# EAGLE board nutzen_01 (EAGLE 7.7.0)
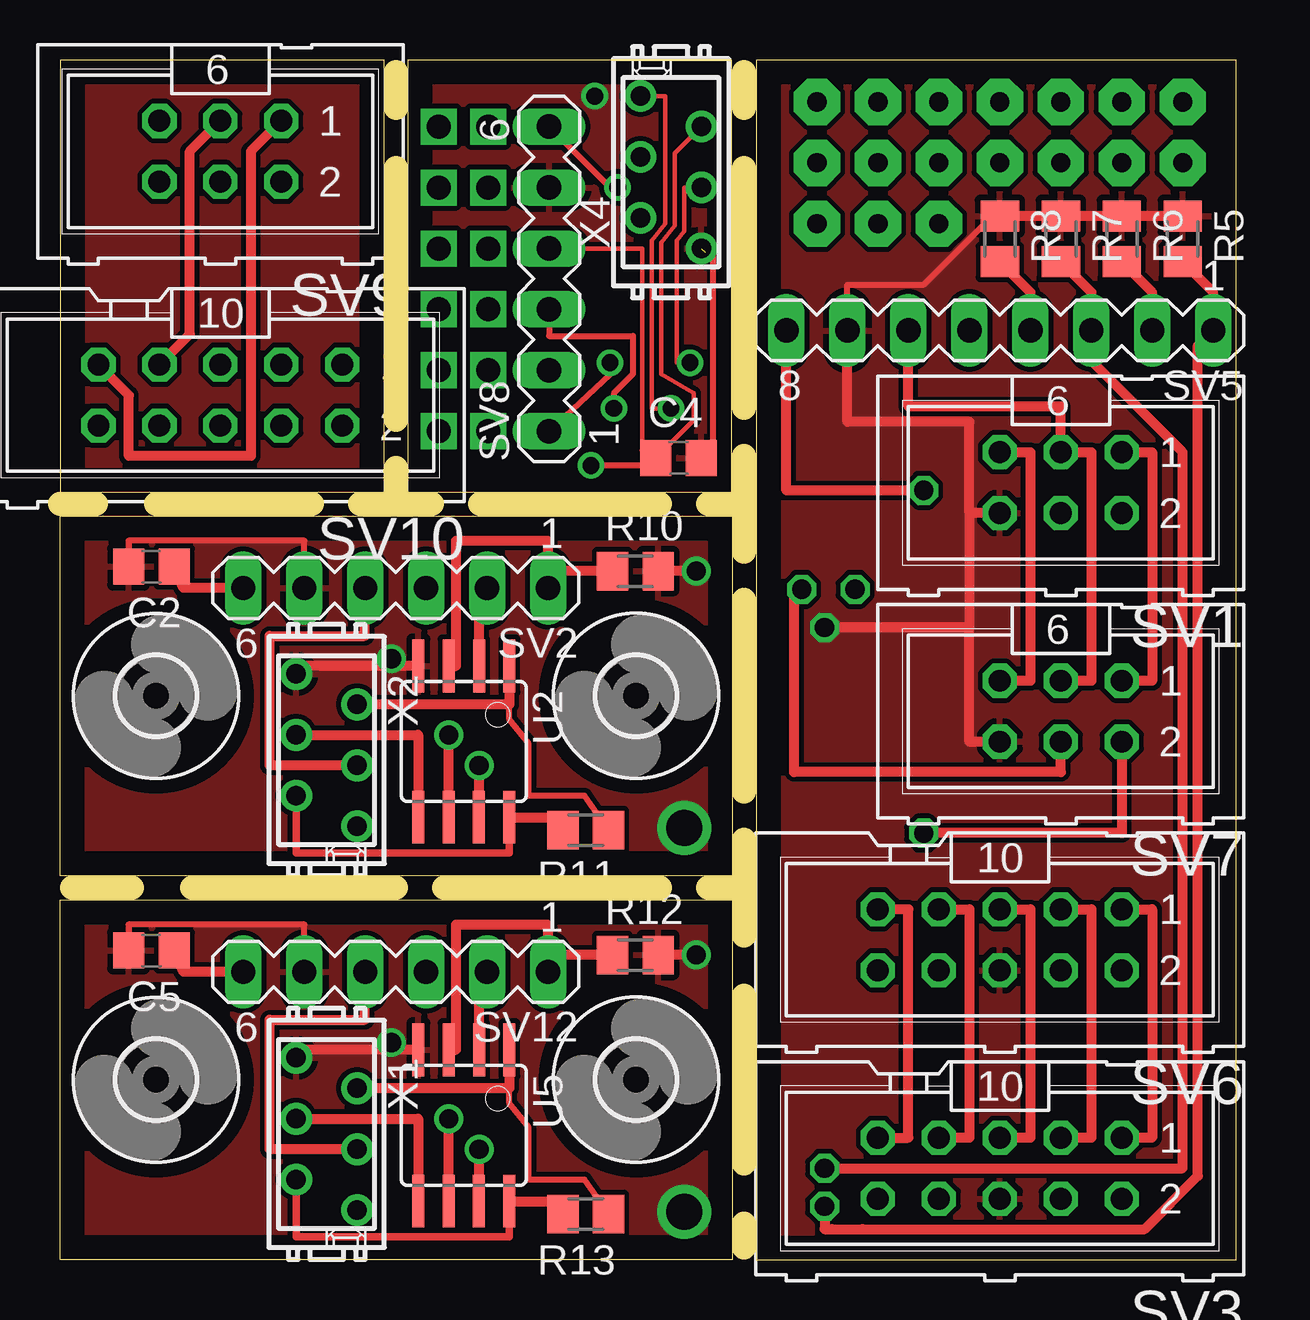
[diagram p0: board, top side]
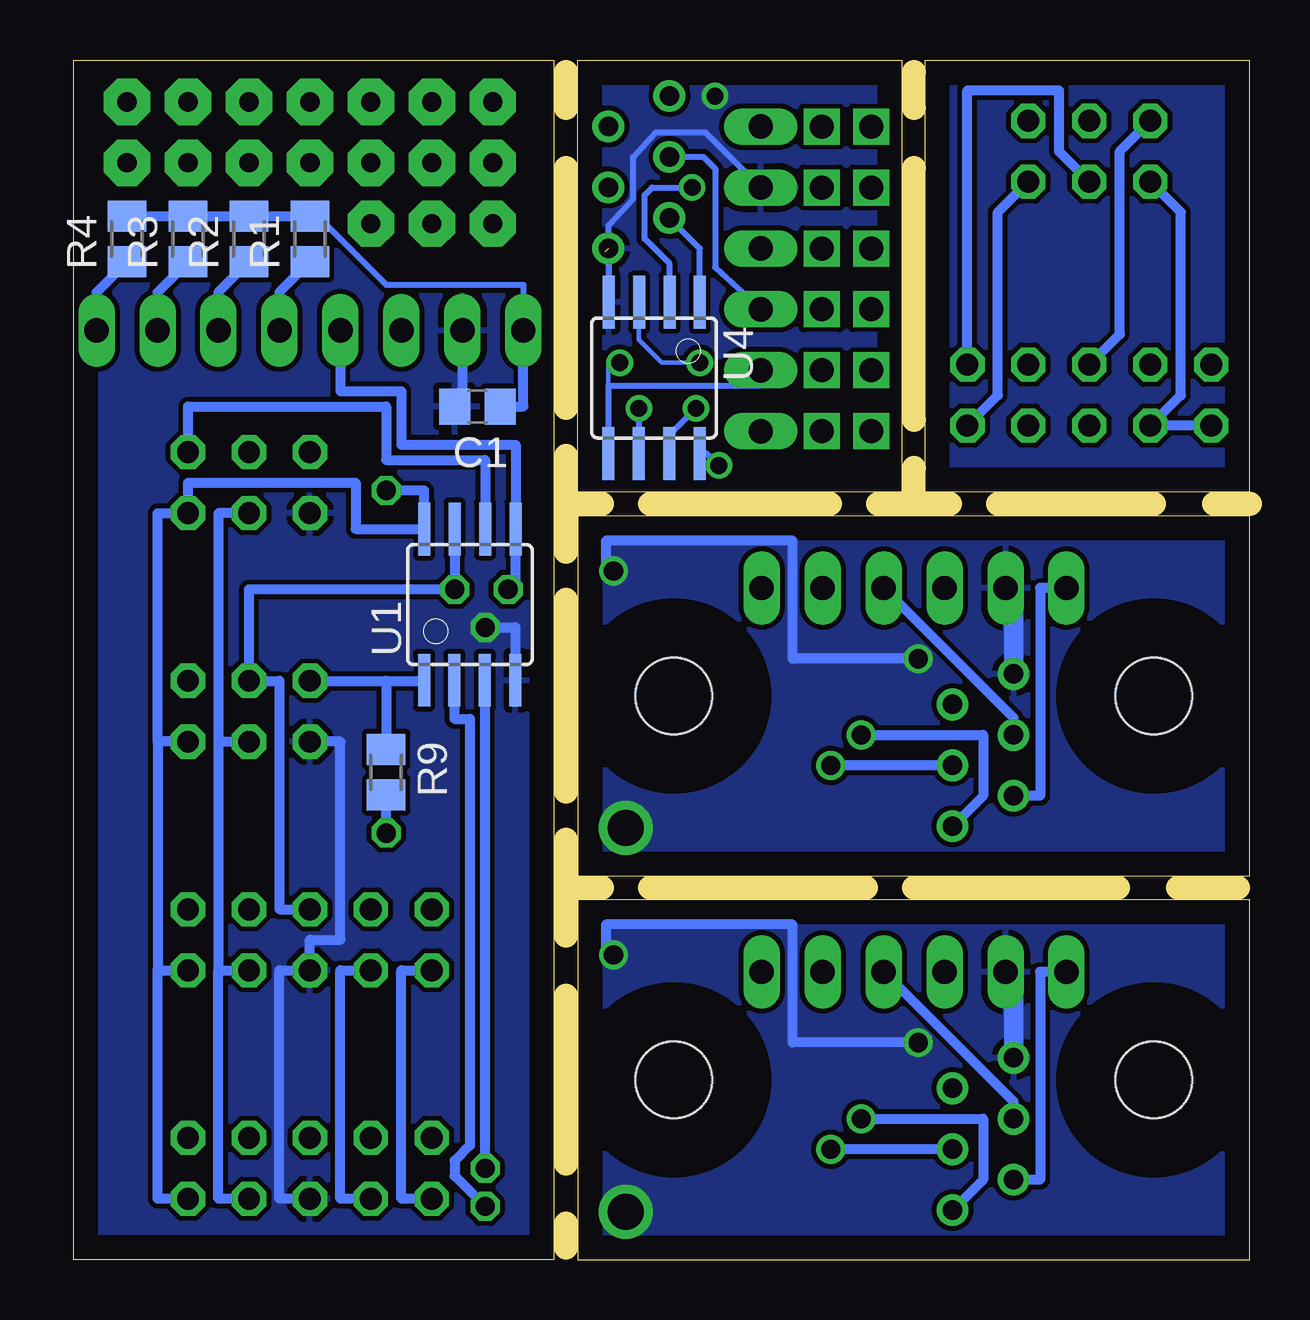
[diagram p1: board, bottom side, seen from below]

Size 49 x 50.01 mm. Coordinates in mm from the lower left corner, seen from the top.
Outline: 0,0 0,15 28,15 28,0 0,0
Outline: 29,0 49,0 49,50 29,50 29,0
Outline: 0,16 0,31 28,31 28,16 0,16
Outline: 28,31.99 28,49.99 14.5,49.99 14.5,31.99 28,31.99
Outline: 0.02,50.01 0.02,32.01 13.52,32.01 13.52,50.01 0.02,50.01
Copper layers (1*16): Top 0.035mm / dielectric 1.5mm / Bottom 0.035mm
Design rules "default": minimum track width 10mil, minimum drill 24mil, track to track 8mil, track to pad 8mil, pad to pad 8mil, via to via 8mil, smd to smd 8mil, copper to edge 40mil, drill to drill 8mil, minimum pad ring 10mil, minimum via ring 8mil, stop-mask expansion 4mil, vias tented up to drill 0mil, thermal gap 10mil
Milling: 22 lines

## Footprints (pad centres in the part's own frame; a part is rotated, then mirrored left to right if it is on the bottom)
C0805 = smd 1.3 x 1.5: 1 -0.95,0; 2 0.95,0
3,2 = hole 3.2: 0,0
M0805 = smd 1.3 x 1.6: 1 -0.95,0; 2 0.95,0
ML6 = drill 0.914 octagon: 1 -2.54,-1.27; 2 -2.54,1.27; 3 0,-1.27; 4 0,1.27; 5 2.54,-1.27; 6 2.54,1.27
MA06-1 = drill 1.016 long: 1 -6.35,0; 2 -3.81,0; 3 -1.27,0; 4 1.27,0; 5 3.81,0; 6 6.35,0
ML10 = drill 0.914 octagon: 1 -5.08,-1.27; 2 -5.08,1.27; 3 -2.54,-1.27; 4 -2.54,1.27; 5 0,-1.27; 6 0,1.27; 7 2.54,-1.27; 8 2.54,1.27; 9 5.08,-1.27; 10 5.08,1.27
MA08-1 = drill 1.016 long: 1 -8.89,0; 2 -6.35,0; 3 -3.81,0; 4 -1.27,0; 5 1.27,0; 6 3.81,0; 7 6.35,0; 8 8.89,0
SOIC8 = smd 0.5 x 2.2: 1 -1.905,-3.154; 2 -0.645,-3.154; 3 0.625,-3.154; 4 1.895,-3.154; 5 1.905,3.154; 6 0.635,3.154; 7 -0.635,3.154; 8 -1.905,3.154
MICROMATCH-6 = drill 0.813: 1 3.175,1.27; 2 1.905,-1.27; 3 0.635,1.27; 4 -0.635,-1.27; 5 -1.905,1.27; 6 -3.175,-1.27

## Placement (x,y rotation side)
C1  100n  [C0805]  32.17,35.56 180 bottom
C2  100n  [C0805]  3.81,28.88 180 top
C4  100n  [C0805]  25.77,33.42 0 top
C5  100n  [C0805]  3.81,12.88 180 top
H1  MOUNT-HOLE3.2  [3,2]  24,23.5 0 top
H2  MOUNT-HOLE3.2  [3,2]  4,23.5 0 top
H11  MOUNT-HOLE3.2  [3,2]  24,7.5 0 top
H12  MOUNT-HOLE3.2  [3,2]  4,7.5 0 top
R1  100k  [M0805]  39.16,42.55 90 bottom
R2  100k  [M0805]  41.7,42.55 90 bottom
R3  100k  [M0805]  44.24,42.55 90 bottom
R4  100k  [M0805]  46.78,42.55 90 bottom
R5  100k  [M0805]  46.78,42.55 270 top
R6  100k  [M0805]  44.24,42.55 270 top
R7  100k  [M0805]  41.7,42.55 270 top
R8  100k  [M0805]  39.16,42.55 270 top
R9  100k  [M0805]  35.98,20.32 270 bottom
R10  100k  [M0805]  23.97,28.7 0 top
R11  100k  [M0805]  21.91,17.91 180 top
R12  100k  [M0805]  23.97,12.7 0 top
R13  100k  [M0805]  21.91,1.91 180 top
SV1  [ML6]  41.7,32.38 180 top
SV2  VL53L1X  [MA06-1]  13.99,28 180 top
SV3  [ML10]  39.16,3.81 180 top
SV5  BNO055  [MA08-1]  39.16,38.73 180 top
SV6  [ML10]  39.16,13.34 180 top
SV7  [ML6]  41.7,22.86 180 top
SV8  [MA06-1]  20.38,40.88 90 top
SV9  [ML6]  6.68,46.2 180 top
SV10  [ML10]  6.68,36.04 180 top
SV12  VL53L1X  [MA06-1]  13.99,12 180 top
U1  TINY45  [SOIC8]  32.49,27.3 0 bottom
U2  TINY45  [SOIC8]  16.82,21.6 180 top
U4  TINY45  [SOIC8]  24.82,36.75 180 bottom
U5  TINY45  [SOIC8]  16.82,5.6 180 top
X1  BUS  [MICROMATCH-6]  11.11,5.24 270 top
X2  BUS  [MICROMATCH-6]  11.11,21.24 270 top
X4  BUS  [MICROMATCH-6]  25.46,45.33 90 top

## Library data of the parts
C1 C2 C4 C5 R1-R13 = rcl
H1 H2 H11 H12 = holes
SV1 SV3 SV6 SV7 SV9 SV10 = con-harting-ml; OC_FARNELL: unknown; OC_NEWARK: unknown
SV2 SV5 SV8 SV12 = con-lstb; OC_FARNELL: unknown; OC_NEWARK: unknown
U1 U2 U4 U5 = avr-7
X1 X2 X4 = con-amp-micromatch; MPN: 7-215464-6; OC_FARNELL: 3784630; OC_NEWARK: 19R8125

## Nets
BNO055_ADD: R1.1 R8.2 SV5.4
BNO055_BOOT: R3.1 R6.2 SV5.2
BNO055_INT: R2.1 R7.2 SV5.3 U1.3
BNO055_RESET: R4.1 R5.2 SV5.1 U1.2
FON: SV10.3
GND: C1.2 R5.1 R6.1 R7.1 R8.1 SV1.6 SV3.6 SV5.7 SV6.6 SV7.6 U1.4
GND1: C2.2 R10.2 SV2.5 U2.4 X2.6
GND3: C4.2 SV8.5 U4.4 X4.6
GND4: C5.2 R12.2 SV12.5 U5.4 X1.6
GND5: SV9.6 SV10.8 SV10.10
GPIO01: SV2.2 U2.2
GPIO04: SV12.2 U5.2
INT: SV9.1 SV10.9
INT_MISO: SV1.1 SV7.1 U1.6
INT_MISO1: U2.6 X2.1
INT_MISO3: U4.6 X4.1
INT_MISO4: U5.6 X1.1
N$1: SV3.7 SV6.7
N$2: SV3.9 SV6.9
N$3: SV3.8 SV6.8
N$4: SV3.10 SV6.10
PB1: SV8.6 U4.2
PB2: SV8.1 U4.3
RESET: R9.1 SV1.5 SV7.5 U1.1
RESET1: R11.1 U2.1 X2.5
RESET3: U4.1 X4.5
RESET4: R13.1 U5.1 X1.5
RESET5: SV9.5 SV10.5
RXD: SV3.1 SV6.1
SCL: SV9.3 SV10.7
SCL_SCK: SV1.3 SV3.5 SV5.6 SV6.5 SV7.3 U1.7
SCL_SCK1: SV2.4 U2.7 X2.3
SCL_SCK3: SV8.3 U4.7 X4.3
SCL_SCK4: SV12.4 U5.7 X1.3
SDA: SV9.4 SV10.1
SDA_MOSI: SV1.4 SV3.4 SV5.5 SV6.4 SV7.4 U1.5
SDA_MOSI1: SV2.3 U2.5 X2.4
SDA_MOSI3: SV8.2 U4.5 X4.4
SDA_MOSI4: SV12.3 U5.5 X1.4
TXD: SV3.3 SV6.3
U14: SV10.4
U14SW: SV10.6
U33: SV9.2 SV10.2
VCC: C1.1 R1.2 R2.2 R3.2 R4.2 R9.2 SV1.2 SV3.2 SV5.8 SV6.2 SV7.2 U1.8
VCC1: C2.1 R11.2 SV2.6 U2.8 X2.2
VCC3: C4.1 SV8.4 U4.8 X4.2
VCC4: C5.1 R13.2 SV12.6 U5.8 X1.2
XSHUT1: R10.1 SV2.1 U2.3
XSHUT3: R12.1 SV12.1 U5.3

## Tracks (layer width: path | path; a pad name or v marks a point on that pad's centre or on a via)
BNO055_ADD
  Top 0.406: SV5.4 40.43,40.33 R8.2
  Bottom 0.406: R8.2 40.43,40.33 SV5.4
BNO055_BOOT
  Top 0.406: SV5.2 45.51,40.33 R6.2
  Bottom 0.406: R6.2 45.51,40.33 SV5.2
BNO055_INT  (via drill 0.8 pad 0.25)
  Top 0.406: R7.2 42.97,40.33 SV5.3 42.97,37.47 46.78,33.66 46.78,3.81 v31.86,3.81
  Bottom 0.406: R7.2 42.97,40.33 SV5.3 | U1.3 v31.87,3.81 v31.86,3.81
BNO055_RESET  (via drill 0.8 pad 0.25)
  Top 0.406: R5.2 48.05,40.33 SV5.1 47.41,38.1 47.41,3.49 45.19,1.27 33.45,1.27 32.16,1.27 31.86,1.27 v31.86,2.22
  Bottom 0.406: R5.2 48.05,40.33 SV5.1 | U1.2 33.14,22.54 32.49,22.54 32.49,4.76 33.13,4.13 33.13,3.49 v31.86,2.22
GND  (via drill 0.8 pad 0.25)
  Top 0.254: R8.1 38.84,43.49 35.98,40.64 32.81,40.64 SV5.7
  Top 0.406: SV7.6 37.89,21.59 37.89,26.35 | SV1.6 37.89,31.11 | 37.89,31.11 37.89,26.35 | R5.1 R6.1 R7.1 R8.1 | 37.89,31.11 37.89,34.92 32.81,34.92 SV5.7 | 37.89,26.35 v31.86,26.35
  Bottom 0.406: SV3.6 40.43,2.54 40.43,12.06 SV6.6 39.16,13.34 37.89,13.34 37.89,21.59 SV7.6 | SV5.7 32.81,35.56 C1.2 | v31.86,26.35 30.6,26.35 U1.4
  pour Bottom: 29,0 49,0 49,50 29,50
  pour Top: 29,0 49,0 49,50 29,50
GND1  (via drill 0.8, 1.5)
  Top 0.254: SV2.5 10.18,29.97 2.86,29.97 C2.2
  Top 0.406: X2.6 9.84,24.75 U2.4 13.97,24.75 v13.81,25.05 | v26.51,28.7 R10.2
  Bottom 0.406: v13.81,25.05 19.05,25.05 19.05,29.97 26.83,29.97 26.83,28.7 v26.51,28.7
  Bottom 0.813: SV2.5 9.84,28 X2.6
  other vias: 26,18
  pour Top: 0,16 28,16 28,31 0,31
  pour Bottom: 0,16 28,16 28,31 0,31
GND3  (via drill 0.7)  (1 unrouted)
  Top 0.254: 26.88,41.99 27.2,41.99 27.2,33.42 C4.2
  Bottom 0.254: X4.6 26.72,42.15 | 26.72,42.15 U4.4 | 26.72,42.15 26.72,43.11 25.7,44.22 25.7,45.96 24.74,46.99 22.68,46.99 SV8.5
  other vias: 22.28,48.5
  pour Bottom: 28,31.99 28,49.99 14.5,49.99 14.5,31.99
  pour Top: 28,31.99 28,49.99 14.5,49.99 14.5,31.99
GND4  (via drill 0.8, 1.5)
  Top 0.254: SV12.5 10.18,13.97 2.86,13.97 C5.2
  Top 0.406: X1.6 9.84,8.75 U5.4 13.97,8.75 v13.81,9.05 | v26.51,12.7 R12.2
  Bottom 0.406: v13.81,9.05 19.05,9.05 19.05,13.97 26.83,13.97 26.83,12.7 v26.51,12.7
  Bottom 0.813: SV12.5 9.84,12 X1.6
  other vias: 26,2
  pour Top: 0,0 28,0 28,15 0,15
  pour Bottom: 0,0 28,0 28,15 0,15
GND5
  Bottom 0.406: SV10.10 SV10.8 2.87,36.04 2.87,43.66 SV9.6
GND6
  pour Bottom: 0.02,50.01 0.02,32.01 13.52,32.01 13.52,50.01
  pour Top: 0.02,50.01 0.02,32.01 13.52,32.01 13.52,50.01
GPIO01
  Top 0.406: U2.2 17.47,28 SV2.2
GPIO04
  Top 0.406: U5.2 17.47,12 SV12.2
INT
  Top 0.406: SV9.1 7.95,46.2 7.95,33.5 2.87,33.5 2.87,36.04 SV10.9
INT_MISO
  Top 0.406: SV1.1 45.51,33.66 45.51,24.13 SV7.1
  Bottom 0.406: SV1.1 44.24,35.56 35.98,35.56 35.98,33.34 31.86,33.34 U1.6
INT_MISO1  (via drill 0.8)
  Top 0.406: U2.6 v16.19,21.87
  Bottom 0.406: v16.19,21.87 11.11,21.87 11.11,19.33 X2.1
INT_MISO3  (via drill 0.7)
  Top 0.178: X4.1 25.22,48.5 25.22,43.18 24.66,42.47 24.66,35.48 v25.46,35.48
  Bottom 0.254: v25.46,35.48 U4.6
INT_MISO4  (via drill 0.8)
  Top 0.406: U5.6 v16.19,5.87
  Bottom 0.406: v16.19,5.87 11.11,5.87 11.11,3.33 X1.1
N$1
  Top 0.406: SV6.7 37.89,14.61 37.89,5.08 SV3.7
N$2
  Top 0.406: SV3.9 35.35,5.08 35.35,14.61 SV6.9
N$3
  Bottom 0.406: SV3.8 37.89,2.54 37.89,12.06 SV6.8
N$4
  Bottom 0.406: SV3.10 35.35,2.54 35.35,12.06 SV6.10
N$5  (via drill 0.8 pad 1.93)
  other vias: 46.78,45.72
N$6  (via drill 0.8 pad 1.93)
  other vias: 44.24,45.72
N$7  (via drill 0.8 pad 1.93)
  other vias: 41.7,45.72
N$8  (via drill 0.8 pad 1.93)
  other vias: 39.16,45.72
N$9  (via drill 0.8 pad 1.93)
  other vias: 36.62,45.72
N$10  (via drill 0.8 pad 1.93)
  other vias: 34.08,45.72
N$11  (via drill 0.8 pad 1.93)
  other vias: 31.54,45.72
N$12  (via drill 0.8 pad 1.93)
  other vias: 31.54,43.18
N$13  (via drill 0.8 pad 1.93)
  other vias: 34.08,43.18
N$14  (via drill 0.8 pad 1.93)
  other vias: 36.62,43.18
N$15  (via drill 0.8 pad 1.93)
  other vias: 31.54,48.26
N$16  (via drill 0.8 pad 1.93)
  other vias: 34.08,48.26
N$17  (via drill 0.8 pad 1.93)
  other vias: 36.62,48.26
N$18  (via drill 0.8 pad 1.93)
  other vias: 39.16,48.26
N$19  (via drill 0.8 pad 1.93)
  other vias: 41.7,48.26
N$20  (via drill 0.8 pad 1.93)
  other vias: 44.24,48.26
N$21  (via drill 0.8 pad 1.93)
  other vias: 46.78,48.26
N$34  (via drill 1 pad 1.42)
  other vias: 17.84,34.53
N$35  (via drill 1 pad 1.42)
  other vias: 17.84,37.07
N$36  (via drill 1 pad 1.42)
  other vias: 17.84,39.61
N$37  (via drill 1 pad 1.42)
  other vias: 17.84,42.15
N$38  (via drill 1 pad 1.42)
  other vias: 17.84,44.69
N$39  (via drill 1 pad 1.42)
  other vias: 17.84,47.23
N$40  (via drill 1 pad 1.42)
  other vias: 15.77,34.53
N$41  (via drill 1 pad 1.42)
  other vias: 15.77,37.07
N$42  (via drill 1 pad 1.42)
  other vias: 15.77,39.61
N$43  (via drill 1 pad 1.42)
  other vias: 15.77,42.15
N$44  (via drill 1 pad 1.42)
  other vias: 15.77,44.69
N$45  (via drill 1 pad 1.42)
  other vias: 15.77,47.23
PB1  (via drill 0.7)
  Top 0.254: v23.23,44.69 22.92,44.69 SV8.6
  Bottom 0.254: U4.2 24.18,41.51 25.22,42.55 25.22,44.37 24.9,44.69 v23.23,44.69
PB2  (via drill 0.7)
  Top 0.254: v22.92,37.39 22.92,36.91 SV8.1
  Bottom 0.178: v22.92,37.39 24.5,37.39 25.46,38.34 25.46,39.9 U4.3
RESET
  Top 0.406: SV1.5 40.43,33.66 40.43,24.13 SV7.5
  Bottom 0.406: SV7.5 35.98,24.13 | 35.98,24.13 R9.1 | 35.98,24.13 34.4,24.13 U1.1
RESET1
  Top 0.254: R11.1 21.86,19.33 19.53,19.33 19.53,21.51 18.73,22.51 U2.1
  Top 0.406: U2.1 18.73,23.14 X2.5
RESET3
  Bottom 0.254: U4.1 22.92,42.15 X4.5
RESET4
  Top 0.254: R13.1 21.86,3.33 19.53,3.33 19.53,5.51 18.73,6.51 U5.1
  Top 0.406: U5.1 18.73,7.14 X1.5
RESET5
  Bottom 0.406: SV10.5 5.41,38.58 5.41,46.2 SV9.5
RXD
  Top 0.406: SV6.1 45.51,14.61 45.51,5.08 SV3.1
SCL
  Top 0.406: SV10.7 5.41,38.58 5.41,46.2 SV9.3
SCL_SCK  (via drill 0.8 pad 0.81)
  Top 0.406: SV6.5 40.43,14.61 40.43,5.08 SV3.5 | SV7.3 42.97,24.13 42.97,33.66 SV1.3 41.7,35.56 35.35,35.56 SV5.6
  Bottom 0.406: SV6.5 40.43,14.61 40.43,24.13 SV7.3 41.7,27.94 v33.13,27.94 U1.7
SCL_SCK1  (via drill 0.8)
  Top 0.406: v17.46,20.6 U2.7 | X2.3 8.73,20.6 8.73,26 12.7,26 12.7,28 SV2.4
  Bottom 0.406: X2.3 v17.46,20.6
SCL_SCK3  (via drill 0.7)
  Top 0.254: SV8.3 20.38,38.5 23.87,38.5 23.87,36.91 23.08,36.12 v23.08,35.48
  Bottom 0.254: SV8.3 22.28,41.36 22.28,45.48 22.76,45.96 X4.3 | v23.08,35.48 24.19,34.37 U4.7
SCL_SCK4  (via drill 0.8)
  Top 0.406: v17.46,4.6 U5.7 | X1.3 8.73,4.6 8.73,10 12.7,10 12.7,12 SV12.4
  Bottom 0.406: X1.3 v17.46,4.6
SDA
  Bottom 0.406: SV10.1 11.76,48.74 7.95,48.74 7.95,46.2 SV9.4
SDA_MOSI  (via drill 0.8 pad 0.25)
  Top 0.406: v30.91,27.94 30.59,27.94 30.59,20.32 41.7,20.32 SV7.4
  Bottom 0.406: SV3.4 42.97,2.54 42.97,12.06 | 42.97,12.06 SV6.4 | SV5.5 37.89,36.2 35.35,36.2 35.35,33.97 30.59,33.97 U1.5 30.59,28.26 v30.91,27.94 | SV1.4 42.97,31.11 42.97,21.59 | 42.97,21.59 42.97,12.06 | 42.97,21.59 SV7.4
SDA_MOSI1
  Top 0.406: X2.4 14.92,21.87 U2.5
  Bottom 0.406: X2.4 9.84,22.58 SV2.3
SDA_MOSI3  (via drill 0.7)
  Top 0.178: X4.4 26.01,44.69 26.01,42.87 25.7,42.47 25.7,37.39 v26.25,37.39
  Bottom 0.178: v26.25,37.39 26.73,37.39 26.73,36.44
  Bottom 0.254: U4.5 26.73,36.44 20.38,36.44 SV8.2
SDA_MOSI4
  Top 0.406: X1.4 14.92,5.87 U5.5
  Bottom 0.406: X1.4 9.84,6.58 SV12.3
TXD
  Top 0.406: SV6.3 42.97,14.61 42.97,5.08 SV3.3
U33
  Bottom 0.406: SV10.2 10.49,36.04 10.49,43.66 SV9.2
VCC  (via drill 0.8 pad 0.25, 0.8 pad 0.81)
  Top 0.406: SV7.2 44.24,17.78 v35.98,17.78 | v35.98,32.07 30.27,32.07 SV5.8
  Bottom 0.254: R1.2 38.84,43.49 35.98,40.64 30.27,40.64 SV5.8
  Bottom 0.406: SV3.2 45.51,2.54 45.51,12.06 | 45.51,12.06 SV6.2 | 45.51,21.59 45.51,31.11 SV1.2 44.24,32.38 37.26,32.38 37.26,30.46 U1.8 34.4,32.07 v35.98,32.07 | SV7.2 45.51,21.59 | 45.51,21.59 45.51,12.06 | v35.98,17.78 R9.2 | R4.2 R3.2 R2.2 R1.2 | SV5.8 30.27,35.56 C1.1 31.54,35.56
VCC1
  Top 0.305: U2.8 18.73,16.95 9.84,16.95 X2.2
  Top 0.406: SV2.6 5.15,28 C2.1 | U2.8 21.12,18.44 R11.2
  Bottom 0.406: SV2.6 8.73,28 8.73,19.33 X2.2
VCC3  (via drill 0.7)
  Top 0.178: SV8.4 24.27,42.15 24.27,33.74 | C4.1 26.41,35.01 26.41,36.12 25.06,36.91 25.06,42.39 25.62,43.1 25.62,46.12 X4.2
  Top 0.254: v22.12,33.1 24.82,33.1 C4.1 24.82,33.74 24.27,33.74
  Bottom 0.254: v22.12,33.1 22.62,33.6 U4.8
VCC4
  Top 0.305: U5.8 18.73,0.95 9.84,0.95 X1.2
  Top 0.406: SV12.6 5.15,12 C5.1 | U5.8 21.12,2.44 R13.2
  Bottom 0.406: SV12.6 8.73,12 8.73,3.33 X1.2
XSHUT1
  Top 0.254: 20.32,28 SV2.1
  Top 0.406: R10.1 20.34,28.7 SV2.1 | U2.3 16.51,24.75 16.51,29.97 20.32,29.97 20.32,28
XSHUT3
  Top 0.254: 20.32,12 SV12.1
  Top 0.406: R12.1 20.34,12.7 SV12.1 | U5.3 16.51,8.75 16.51,13.97 20.32,13.97 20.32,12